# Altium PCB PCB_test.PcbDoc
Units mil, origin at the board's own origin, x right, y up, seen from the top; angles counter-clockwise.
Board outline 7910 x 6105 mil, 2 copper layers (Top Layer, Bottom Layer); 3 components, 0 nets, 21 pads, 0 vias.
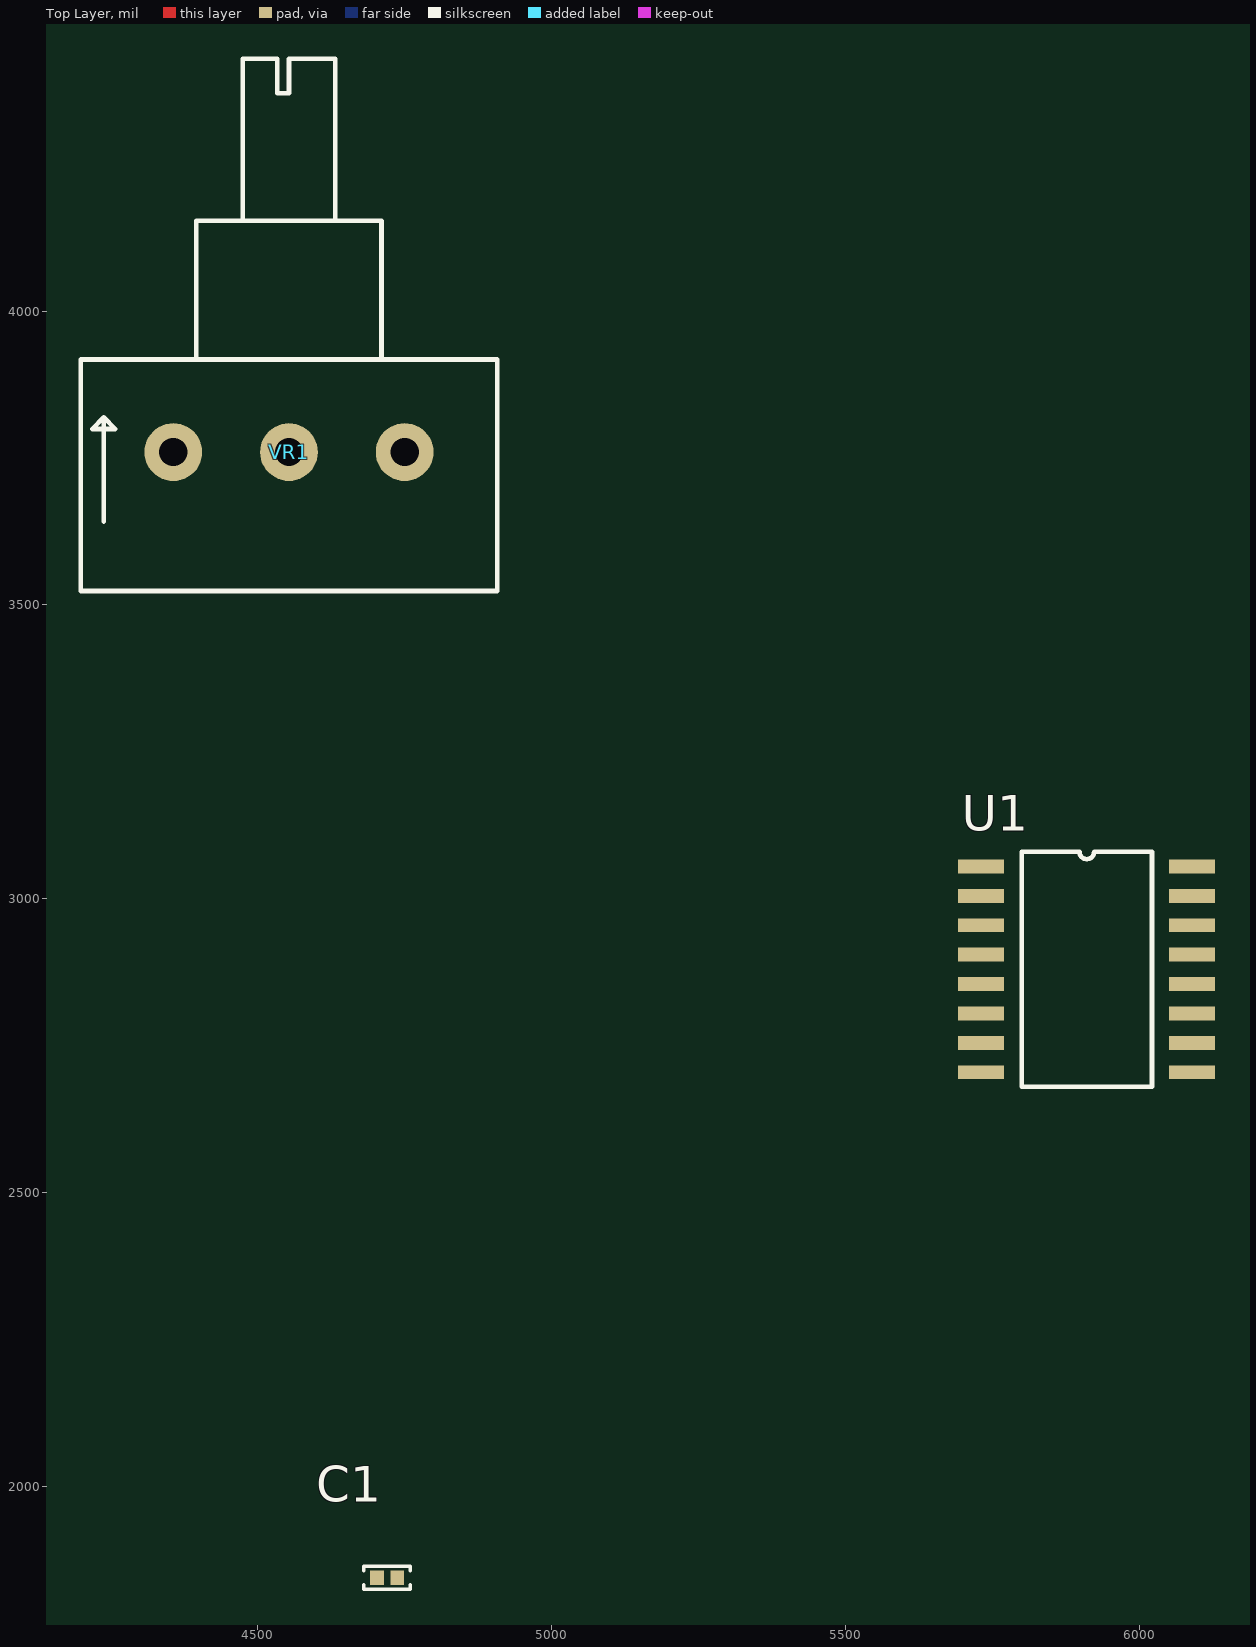
[diagram p0: Top Layer view]
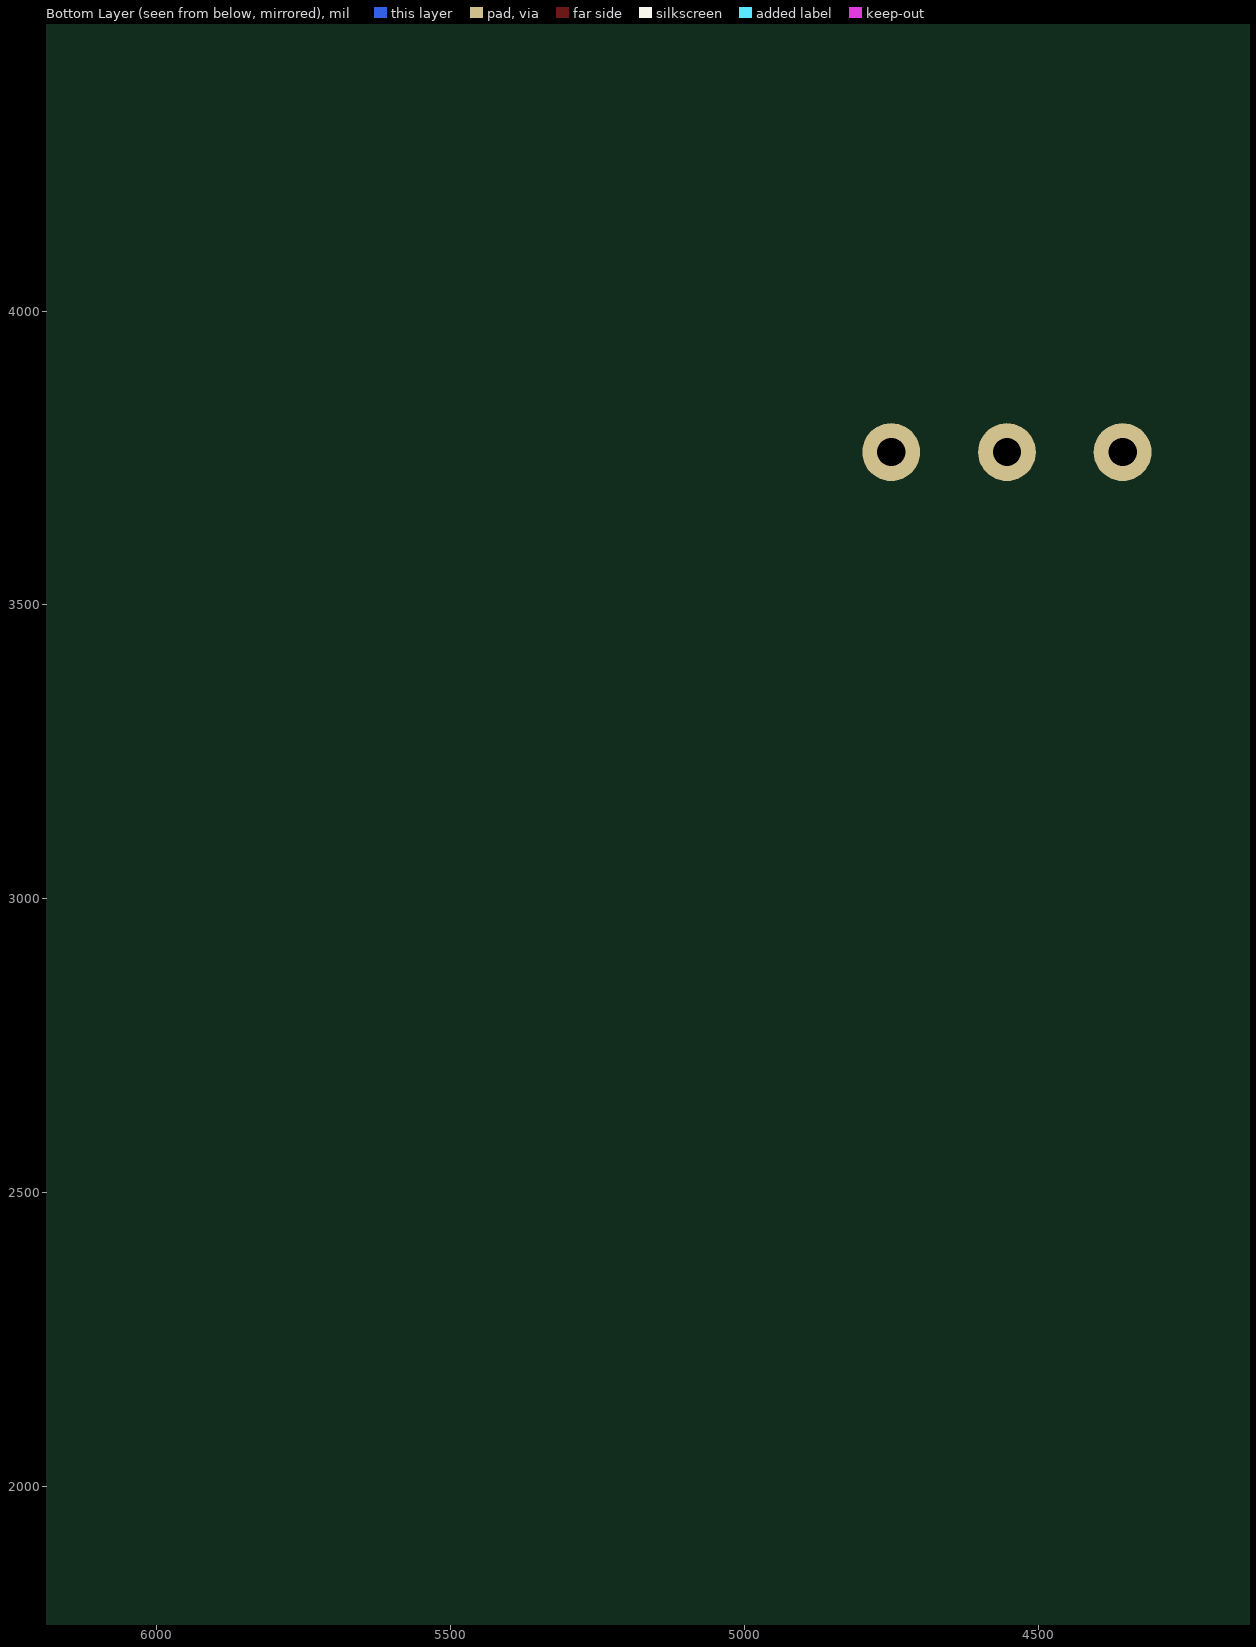
[diagram p1: Bottom Layer view, seen from below]

## Layer stack, top to bottom
Top Solder: solder mask 0.4, Solder Resist, Dk 3.5
Top Layer: signal copper 1.4
Dielectric 1: dielectric 12.6, FR-4, Dk 4.8
Bottom Layer: signal copper 1.4
Bottom Solder: solder mask 0.4, Solder Resist, Dk 3.5

## Board outline
0,1000 7910,1000 7910,7105 0,7105

## Design rules (kind name [scope] priority, off if disabled: settings)
Clearance [All] p1: gap=10 ignorepadtopadclearanceinfootprint=FALSE except(0: Arc-Hole Track-Hole SMDPad-Hole THPad-Hole Via-Hole Fill-Hole Poly-Hole Region-Hole Text-Hole)
MinimumAnnularRing [All] p1: minimumring=6
MinimumSolderMaskSliver [All] p1: minsoldermaskwidth=0
PolygonConnect [All] p1: connectstyle=Relief reliefconductorwidth=10 reliefentries=4 polygonreliefangle="90 Angle" airgapwidth=10
RoutingVias [All] p1: holewidth=28 width=50 viastyle="Through Hole" minholewidth=28 minwidth=50 maxholewidth=28 maxwidth=50
SilkToSolderMaskClearance [IsPad] p1: minsilkscreentomaskgap=3.94 clearancetoexposedcopper=TRUE
SolderMaskExpansion [All] p1: expansion=4 istentingtop=FALSE
Width [All] p1: maxlimit=10 minlimit=10 preferedwidth=10
28 further rules are at their usual default settings.

## Components (designator, comment, footprint, x,y, rotation, side; value= is the part's Value field where it differs from the comment)
C1 "2200pF" "CAP 0402_1005" 4720,1845 r0 top
U1 "SN74HC595NSR" SOIC16 5910,2880 r0 top
VR1 "POT 10K" 5MM_POT 4553.15,3760 r90 top

## Footprints (in the part's own frame and the unit in brackets; to place one, negate y for a bottom-side part, rotate by r counter-clockwise, add the part's x,y. Pads: shape width x height; smd on the part's side, far side on the other; paste and mask are expansions set on the pad)
5MM_POT [mm]
  round 2.5 hole 1.22: 1(0,5) 2(0,0) 2(0,-5)
  silkscreen extent -6,-9 17,9, body extent -5.76,-10.02 23.24,10.22, height 23.48
"CAP 0402_1005" [mm] "Chip Capacitor, 2-Leads, Body 1.02x0.51mm, IPC Medium Density"
  rect 0.6x0.64 smd: 1(-0.44,0) 2(0.44,0)
  silkscreen extent -1,-0.5 1,0.5, body extent -0.5,-0.26 0.5,0.26, height 0.52
SOIC16 [mm]
  rect 2x0.6 smd: 1(-4.561,4.445) 2(-4.561,3.175) 3(-4.561,1.905) 4(-4.561,0.635) 5(-4.561,-0.635) 6(-4.561,-1.905) 7(-4.561,-3.175) 8(-4.561,-4.445) 9(4.561,-4.445) 10(4.561,-3.175) 11(4.561,-1.905) 12(4.561,-0.635) 13(4.561,0.635) 14(4.561,1.905) 15(4.561,3.175) 16(4.561,4.445)
  silkscreen extent -2.8,-5.08 2.83,5.08, body extent -4.07,-5.27 4.14,5.22, height 2.01

## Part data
C1: library part C0402C222F4GAC7867, "CAP CER 2200PF 16V NP0 0402", Device Package="0402 (1005 Metric)", Manufacturer=KEMET, Operating Temperature="-55°C ~ 125°C", Supplier Part Number 1=399-14433-1-ND, Temperature Coefficient="C0G, NP0", Tolerance=±1%, Voltage - Rated=16V, Applications="General Purpose", Capacitance=2200pF, ComponentLink1Description=Datasheet, ComponentLink1URL=https://api.kemet.com/component-edge/download/datasheet/C0402C222F4GACTU.pdf, ComponentLink2Description="DigiKey Link", ComponentLink2URL=http://digikey.com/product-detail/en/kemet/C0402C222F4GAC7867/399-14433-1-ND/7103725, Features="Low ESL", LastUpdated="02/09/2020 01:02:25", Lifecycle Status=Active, Minimum Order=1, Mounting Type="Surface Mount, MLCC", Package / Case="0402 (1005 Metric)", Packaging=TapeAndReel, Part Number=C0402C222F4GAC7867, Part Status=Active, PartId=1715, Price=0.51, Series="SMD Comm C0G", Size / Dimension="0.039\" L x 0.020\" W (1.00mm x 0.50mm)", Supplier 1=DigiKey, Thickness (Max)="0.022\" (0.55mm)"
U1: "Shift Register Single 8-Bit Serial to Serial/Parallel 16-Pin SOP T/R", Case/Package=SOP, Manufacturer="Texas Instruments", Max Operating Temperature=85°C, Max Supply Voltage=6V, Min Operating Temperature=-40°C, Min Supply Voltage=2V, Operating Supply Voltage=5V, Package Quantity=2000, Quiescent Current=8uA, Supplier Part Number 1=296-26485-1-ND, Category="Shift Registers", ComponentLink1Description=https://datasheet.ciiva.com/26807/getdatasheetpartid-39956-26807430.pdf?src-supplier=Verical, ComponentLink1URL=https://datasheet.ciiva.com/26807/getdatasheetpartid-39956-26807430.pdf?src-supplier=Verical, ComponentLink2Description=https://datasheet.ciiva.com/14296/sn74hc595-14296695.pdf?src-supplier=Avnet, ComponentLink2URL=https://datasheet.ciiva.com/14296/sn74hc595-14296695.pdf?src-supplier=Avnet, ComponentLink3Description=https://datasheet.ciiva.com/1886/sn74hc595-1886315.pdf?src-supplier=Digi-Key, ComponentLink3URL=https://datasheet.ciiva.com/1886/sn74hc595-1886315.pdf?src-supplier=Digi-Key, ComponentLink4Description=https://datasheet.ciiva.com/1886/sn74hc595-1886316.pdf?src-supplier=Digi-Key, ComponentLink4URL=https://datasheet.ciiva.com/1886/sn74hc595-1886316.pdf?src-supplier=Digi-Key, ComponentLink5Description=https://datasheet.ciiva.com/1886/sn74hc595-1886317.pdf?src-supplier=Digi-Key, ComponentLink5URL=https://datasheet.ciiva.com/1886/sn74hc595-1886317.pdf?src-supplier=Digi-Key, ComponentLink6Description=https://datasheet.ciiva.com/48704/001074736-da-01-en-ic-shift-regist-sn74hc595nsr-soic-16-tid-48704219.pdf?src-supplier=Conrad, ComponentLink6URL=https://datasheet.ciiva.com/48704/001074736-da-01-en-ic-shift-regist-sn74hc595nsr-soic-16-tid-48704219.pdf?src-supplier=Conrad, Contact Plating=Gold, Direction=Unidirectional, Lead Free="Lead Free", Logic Function="Shift Register", Manufacturer Part Number=SN74HC595NSR, Mount="Surface Mount", Number of Bits=8, Number of Bits per Element=8, Number of Circuits=1, Number of Elements=1, Number of Input Lines=1, Number of Output Lines=9, Number of Pins=16, Output Type=3-STATE, Packaging="Tape and Reel", Pricing 1="1=0.60000, 10=0.51700, 25=0.48240, 100=0.38580, 250=0.35828, 500=0.30316, 1000=0.23426 (USD)", Propagation Delay=34ns, Radiation Hardening=No, REACH SVHC="No SVHC", RoHS=Yes, RoHS Compliant=Yes, Series=74HC, Stock 1=3063, Supplier 1=Digi-Key, Technology=CMOS, Turn-On Delay Time=250ns, Weight=0.007079oz
VR1: "Res Conductive Plastic POT 10K Ohm 20% 1/5W 1(Elec)/1(Mech)Turn 6mm Pin Panel Mount/Through Hole", Manufacturer="TT BI", Manufacturer Part Number=P160KN2-0QA25B10K, Max Operating Temperature=70°C, Max Power Dissipation=200mW, Min Operating Temperature=-20°C, Package Quantity=100, Resistance=10kR, Resistor Type="Conductive Plastic", Supplier Part Number 1=987-1715-ND, Tolerance=20%, Actuator Diameter=0.236inch, Actuator Length=0.984inch, Category="Variable Resistors and Potentiometers", ComponentLink1Description=https://datasheet.ciiva.com/48425/p160-eng-tds-48425253.pdf?src-supplier=Distrelec, ComponentLink1URL=https://datasheet.ciiva.com/48425/p160-eng-tds-48425253.pdf?src-supplier=Distrelec, Depth=17mm, Length=34.5mm, Military Standard=Not, Mount=Panel, Number of Gangs=1, Number of Turns=1, Packaging=Tray, Power Rating=200mW, Pricing 1="1=0.79000, 10=0.71300, 25=0.64400, 50=0.62100, 100=0.58650, 250=0.56352, 880=0.50600, 1760=0.43700, 5280=0.35650 (USD)", RoHS=Yes, Stock 1=2543, Supplier 1=Digi-Key, Taper=Linear, Termination=Pin, Type=Potentiometer

## Nets (pads, with @x,y where several pads share a name; then routed paths per layer and width w, separated by ;. In a path a pad name is that pad's centre, name@x,y a point inside that pad or via, vN(x,y) a via of type N, cw(c..) or ccw(c..) an arc to the next point about the centre after c; other vN are vias at no path point)
pads on no net: C1.1 C1.2 U1.1 U1.2 U1.3 U1.4 U1.5 U1.6 U1.7 U1.8 U1.9 U1.10 U1.11 U1.12 U1.13 U1.14 U1.15 U1.16 VR1.1 VR1.2